# Altium PCB PCB1.PcbDoc
Units mm, origin at the board's own origin, x right, y up, seen from the top; angles counter-clockwise.
Board outline 100 x 50 mm, 2 copper layers (Top Layer, Bottom Layer); 29 components, 33 nets, 84 pads, 0 vias.
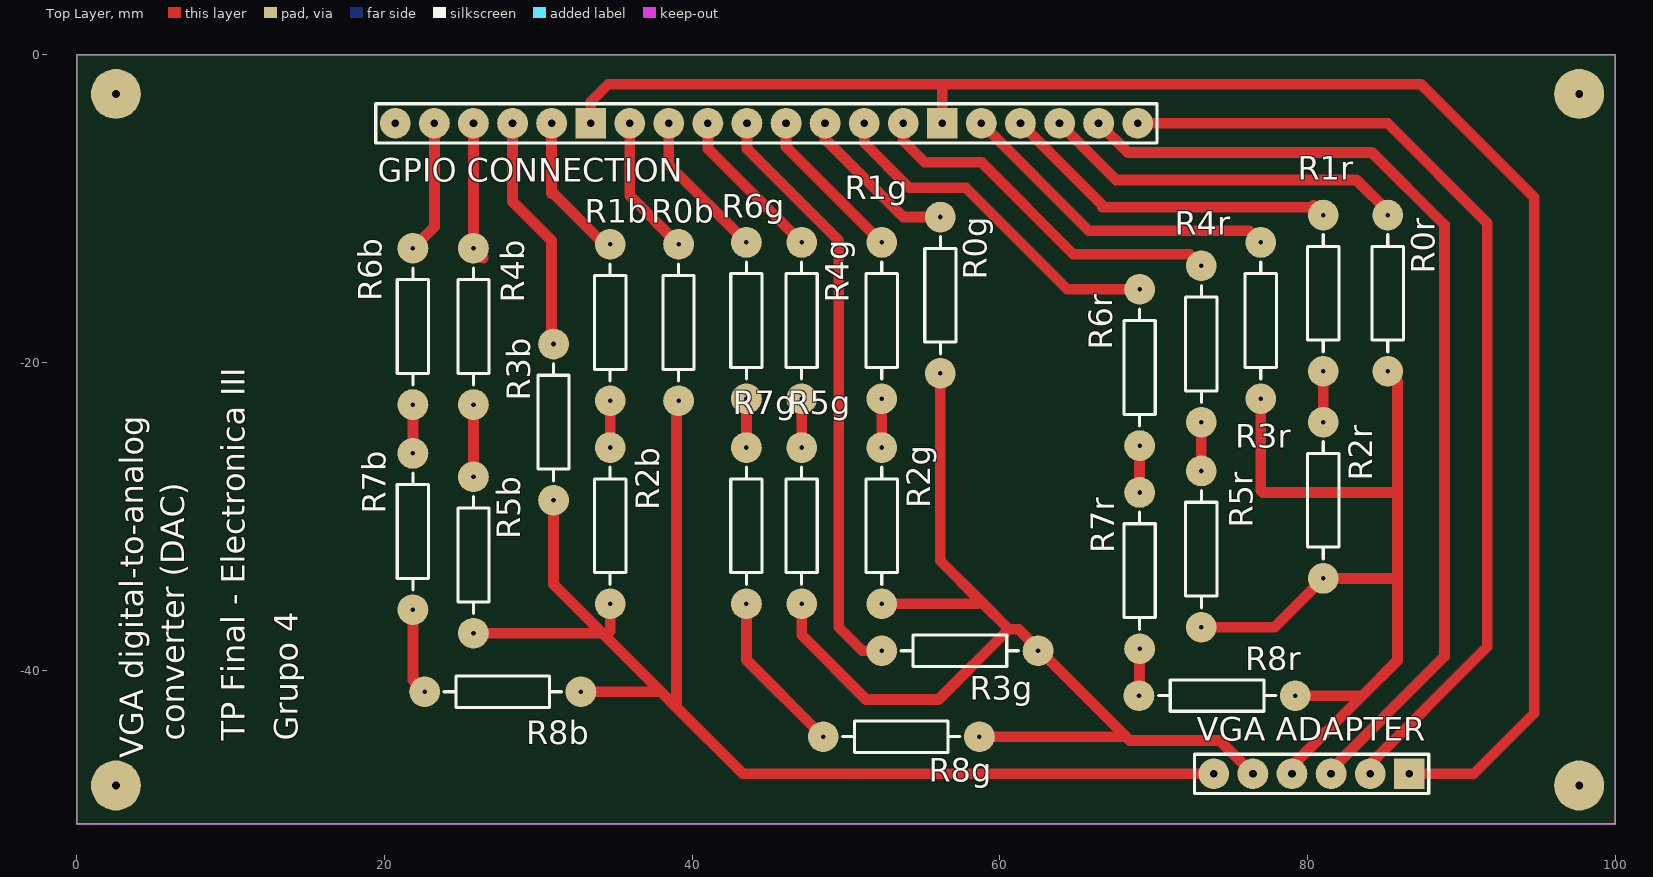
[diagram p0: Top Layer view]
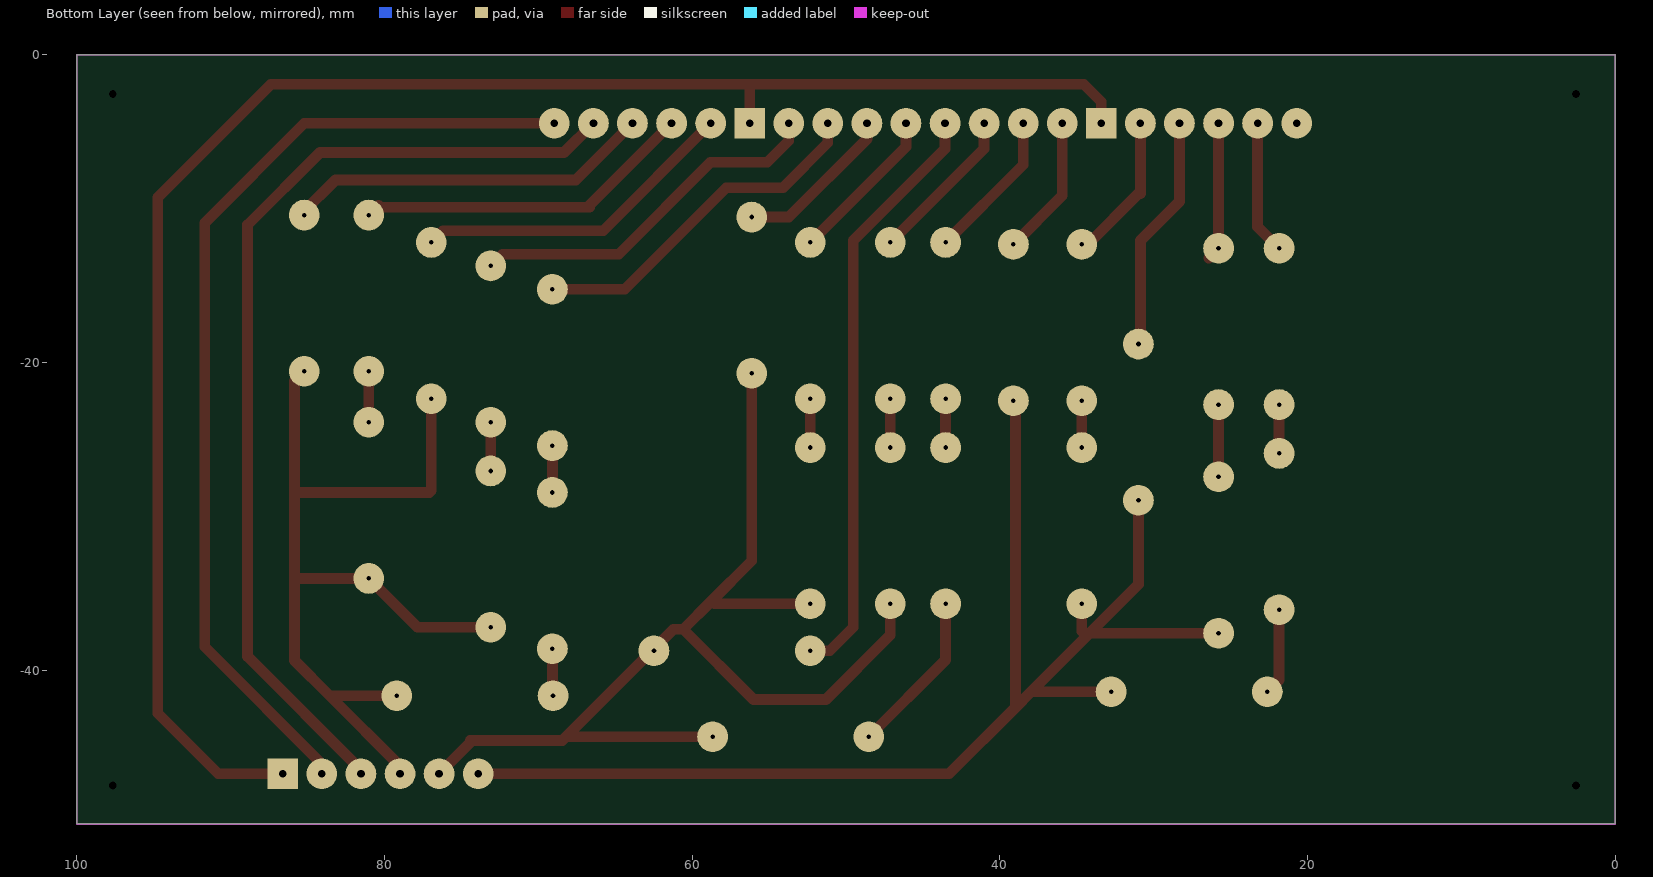
[diagram p1: Bottom Layer view, seen from below]
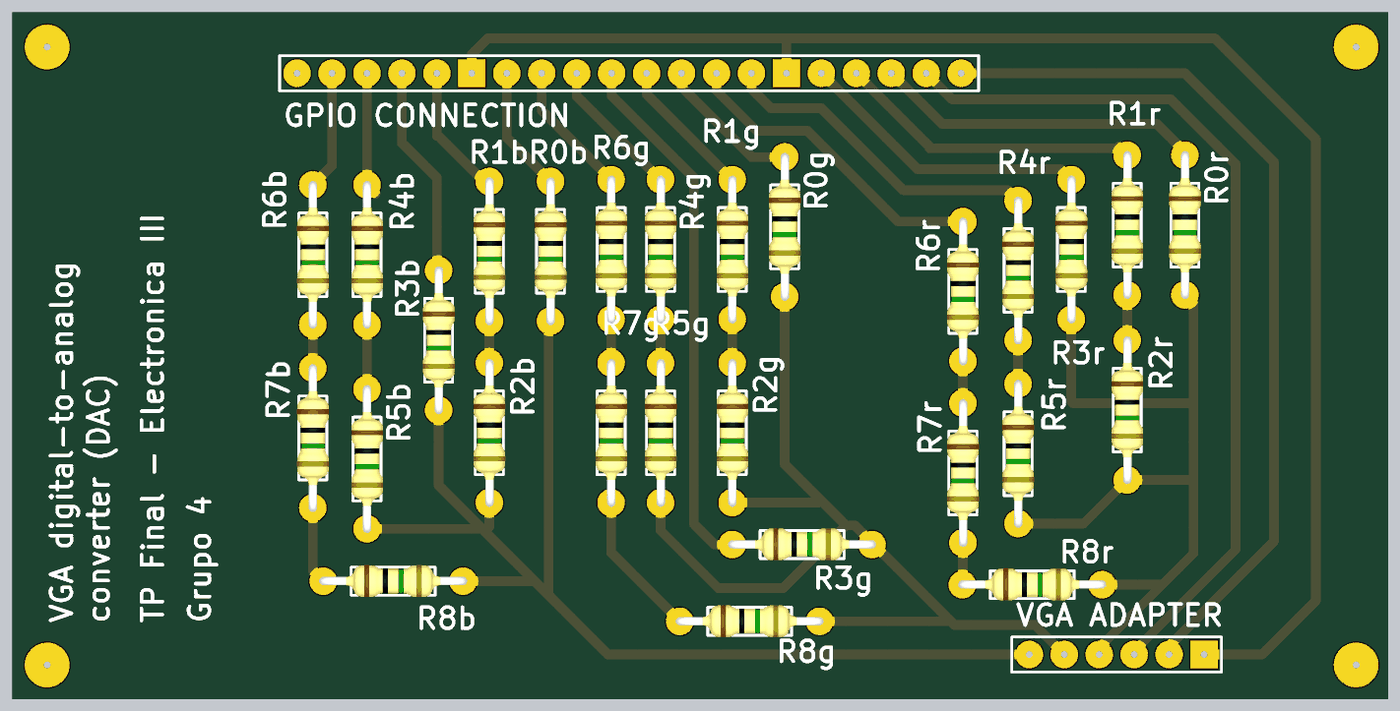
[diagram p2: 3D render of the assembled board from above, using the file's embedded part models]

## Layer stack, top to bottom
Top Layer: signal copper 0.0356
Dielectric: dielectric 0.32, FR-4, Dk 4.8
Bottom Layer: signal copper 0.0356

## Board outline
0,0 100,0 100,-50 0,-50

## Design rules (kind name [scope] priority, off if disabled: settings)
Clearance [All] p1: gap=0.4
PolygonConnect [All] p1: connectstyle=Relief reliefconductorwidth=0.254 reliefentries=4 polygonreliefangle="90 Angle" airgapwidth=0.254
RoutingVias [All] p1: holewidth=0.711 width=1.27 viastyle="Through Hole" minholewidth=0.711 minwidth=1.27 maxholewidth=0.711 maxwidth=1.27
SolderMaskExpansion [All] p1: expansion=0.102
Width [All] p1: maxlimit=0.7 minlimit=0.7 preferedwidth=0.7
28 further rules are at their usual default settings.

## Components (designator, comment, footprint, x,y, rotation, side; value= is the part's Value field where it differs from the comment)
"GPIO CONNECTION" "Header 20" HDR1X20 20.701,-4.445 r0 top
R0b "560" RES400 39.116,-12.319 r270 top
R0g "560" RES400 56.134,-10.541 r270 top
R0r "560" RES400 85.217,-10.414 r270 top
R1b "1000" RES400 34.671,-12.319 r270 top
R1g "1000" RES400 52.324,-12.192 r270 top
R1r "1000" RES400 81.026,-10.414 r270 top
R2b "68" RES400 34.671,-25.527 r270 top
R2g "68" RES400 52.324,-25.527 r270 top
R2r "68" RES400 81.026,-23.876 r270 top
R3b "2200" RES400 30.988,-18.796 r270 top
R3g "2200" RES400 52.324,-38.735 r0 top
R3r "2200" RES400 76.962,-12.192 r270 top
R4b "4000" RES400 25.781,-12.573 r270 top
R4g "4000" RES400 47.117,-12.192 r270 top
R4r "4000" RES400 73.098,-13.716 r270 top
R5b "330" RES400 25.781,-27.432 r270 top
R5g "330" RES400 47.117,-25.527 r270 top
R5r "330" RES400 73.098,-27.051 r270 top
R6b "2700" RES400 21.844,-12.573 r270 top
R6g "2700" RES400 43.525,-12.192 r270 top
R6r "2700" RES400 69.088,-15.24 r270 top
R7b "2700" RES400 21.844,-25.908 r270 top
R7g "2700" RES400 43.525,-25.527 r270 top
R7r "2700" RES400 69.088,-28.448 r270 top
R8b "2700" RES400 22.606,-41.402 r0 top
R8g "2700" RES400 48.514,-44.323 r0 top
R8r "2700" RES400 69.047,-41.656 r0 top
"VGA ADAPTER" "Header 6" HDR1X6 86.614,-46.736 r180 top

## Footprints (in the part's own frame and the unit in brackets; to place one, negate y for a bottom-side part, rotate by r counter-clockwise, add the part's x,y. Pads: shape width x height; smd on the part's side, far side on the other; paste and mask are expansions set on the pad)
HDR1X6 [mm] "Connector; Header; 6 Position"
  rect 2x2 hole 0.5: 1(0,0)
  round 2 hole 0.5: 2(2.54,0) 3(5.08,0) 4(7.62,0) 5(10.16,0) 6(12.7,0)
  silkscreen extent -1.27,-1.27 13.97,1.27
HDR1X20 [mm] "Connector; Header; 20 Position"
  round 2 hole 0.5: 1(0,0) 2(2.54,0) 3(5.08,0) 4(7.62,0) 5(10.16,0) 7(15.24,0) 8(17.78,0) 9(20.32,0) 10(22.86,0) 11(25.4,0) 12(27.94,0) 13(30.48,0) 14(33.02,0) 16(38.1,0) 17(40.64,0) 18(43.18,0) 19(45.72,0) 20(48.26,0)
  rect 2x2 hole 0.5: 6(12.7,0) 15(35.56,0)
  silkscreen extent -1.27,-1.27 49.53,1.27
RES400 [mm]
  round 2 hole 0.3: 1(0,0) 2(10.16,0)
  silkscreen extent 1.27,-1.02 8.89,1.02, body extent -0.3,-1.14 10.46,1.17, height 2.43

## Part data
"GPIO CONNECTION": "Header, 20-Pin"
R0b R0g R0r R1b R1g R1r R2b R2g R2r R3b R3g R3r R4b R4g R4r R5b R5g R5r R6b R6g R6r R7b R7g R7r R8b R8g R8r: library part RES
"VGA ADAPTER": "Header, 6-Pin"

## Free pads (board coordinates)
  round 3.25 / inner round 0 / far side round 0 hole 0.5: 0(2.54,-47.498) 0(2.54,-2.54) 0(97.663,-47.498) 0(97.663,-2.54)

## Nets (pads, with @x,y where several pads share a name; then routed paths per layer and width w, separated by ;. In a path a pad name is that pad's centre, name@x,y a point inside that pad or via, vN(x,y) a via of type N, cw(c..) or ccw(c..) an arc to the next point about the centre after c; other vN are vias at no path point)
"NetGPIO CONNECTION_2": "GPIO CONNECTION.2" R6b.1 | length 8.7
  Top Layer w0.7: R6b.1 23.241,-11.176 23.241,-4.445
"NetGPIO CONNECTION_3": "GPIO CONNECTION.3" R4b.1 | length 9
  Top Layer w0.7: 25.781,-4.445 R4b.1 R4b.1@26.416,-13.208
"NetGPIO CONNECTION_4": "GPIO CONNECTION.4" R3b.1 | length 15.5
  Top Layer w0.7: 28.321,-4.445 28.321,-9.525 30.861,-12.065 30.861,-18.669 R3b.1
"NetGPIO CONNECTION_5": "GPIO CONNECTION.5" R1b.1 | length 9.7
  Top Layer w0.7: 30.861,-4.445 30.861,-9.017 30.988,-9.017 34.29,-12.319 R1b.1
"NetGPIO CONNECTION_6": "GPIO CONNECTION.6" "GPIO CONNECTION.15" "VGA ADAPTER.1" | length 112.1
  Top Layer w0.7: 33.401,-4.445 33.401,-3.048 34.544,-1.905 56.261,-1.905 ; 56.261,-4.445 56.261,-1.905 ; 86.614,-46.736 90.805,-46.736 94.742,-42.799 94.742,-9.271 87.376,-1.905 56.261,-1.905
"NetGPIO CONNECTION_7": "GPIO CONNECTION.7" R0b.1 | length 9.2
  Top Layer w0.7: 35.941,-4.445 35.941,-9.144 R0b.1
"NetGPIO CONNECTION_8": "GPIO CONNECTION.8" R6g.1 | length 9.8
  Top Layer w0.7: 38.481,-4.445 38.481,-7.148 R6g.1
"NetGPIO CONNECTION_9": "GPIO CONNECTION.9" R4g.1 | length 10.3
  Top Layer w0.7: 41.021,-4.445 41.021,-6.096 R4g.1
"NetGPIO CONNECTION_10": "GPIO CONNECTION.10" R3g.1 | length 38.7
  Top Layer w0.7: 43.561,-4.445 43.561,-6.096 49.53,-12.065 49.53,-37.211 51.054,-38.735 R3g.1
"NetGPIO CONNECTION_11": "GPIO CONNECTION.11" R1g.1 | length 10.3
  Top Layer w0.7: 46.101,-4.445 46.101,-5.969 R1g.1
"NetGPIO CONNECTION_12": "GPIO CONNECTION.12" R0g.1 | length 10.6
  Top Layer w0.7: 48.641,-4.445 48.641,-5.461 53.721,-10.541 R0g.1
"NetGPIO CONNECTION_13": "GPIO CONNECTION.13" R6r.1 | length 23.1
  Top Layer w0.7: 51.181,-4.445 51.181,-5.715 54.102,-8.636 57.785,-8.636 64.389,-15.24 R6r.1
"NetGPIO CONNECTION_14": "GPIO CONNECTION.14" R4r.1 | length 23.9
  Top Layer w0.7: 53.721,-4.445 53.721,-5.588 55.118,-6.985 58.801,-6.985 64.77,-12.954 72.336,-12.954 R4r.1
"NetGPIO CONNECTION_16": "GPIO CONNECTION.16" R3r.1 | length 21.4
  Top Layer w0.7: 58.801,-4.445 65.786,-11.43 76.2,-11.43 R3r.1
"NetGPIO CONNECTION_17": "GPIO CONNECTION.17" R1r.1 | length 22.2
  Top Layer w0.7: 61.341,-4.445 66.675,-9.779 ; 66.675,-9.906 R1r.1@80.391,-9.906 ; R1r.1@80.391,-9.779 R1r.1
"NetGPIO CONNECTION_18": "GPIO CONNECTION.18" R0r.1 | length 23.9
  Top Layer w0.7: 63.881,-4.445 67.564,-8.128 83.185,-8.128 R0r.1@85.344,-10.287
"NetGPIO CONNECTION_19": "GPIO CONNECTION.19" "VGA ADAPTER.3" | length 64
  Top Layer w0.7: 66.421,-4.445 68.326,-6.35 84.201,-6.35 88.9,-11.049 88.9,-39.116 81.534,-46.482 81.534,-46.736
"NetGPIO CONNECTION_20": "GPIO CONNECTION.20" "VGA ADAPTER.2" | length 64.2
  Top Layer w0.7: 68.961,-4.445 85.217,-4.445 91.694,-10.922 91.694,-38.481 83.757,-46.419
NetR0b_2: "VGA ADAPTER.6" R0b.2 R2b.2 R3b.2 R5b.2 R8b.2 | length 89.4
  Top Layer w0.7: R5b.2 34.163,-37.592 ; R3b.2 30.988,-34.417 34.163,-37.592 ; R8b.2 37.973,-41.402 ; R2b.2 34.671,-37.465 34.544,-37.592 34.163,-37.592 ; R0b.2 38.989,-22.606 38.989,-42.418 ; 73.914,-46.736 43.307,-46.736 38.989,-42.418 ; 34.163,-37.592 37.973,-41.402 ; 37.973,-41.402 38.989,-42.418
NetR0g_2: "VGA ADAPTER.5" R0g.2 R2g.2 R3g.2 R5g.2 R8g.2 | length 73.5
  Top Layer w0.7: R5g.2 47.117,-37.719 51.308,-41.91 56.007,-41.91 60.579,-37.338 ; R2g.2 58.547,-35.687 58.737,-35.496 ; R0g.2 56.134,-32.893 58.737,-35.496 ; R8g.2 68.199,-44.323 ; 76.454,-46.736 74.422,-44.704 74.422,-44.577 68.453,-44.577 68.199,-44.323 ; 58.737,-35.496 60.579,-37.338 ; 60.579,-37.338 61.214,-37.338 68.199,-44.323
NetR0r_2: "VGA ADAPTER.4" R0r.2 R2r.2 R3r.2 R5r.2 R8r.2 | length 62.6
  Top Layer w0.7: R5r.2 77.851,-37.211 R2r.2 85.852,-34.036 ; R3r.2 76.962,-28.321 77.089,-28.448 85.852,-28.448 ; 78.994,-46.736 78.994,-46.228 83.566,-41.656 ; R8r.2 83.566,-41.656 ; R0r.2 85.852,-21.209 85.852,-28.448 ; 83.566,-41.656 85.852,-39.37 85.852,-34.036 ; 85.852,-34.036 85.852,-28.448
NetR1b_2: R1b.2 R2b.1 | length 3
  Top Layer w0.7: R2b.1 R1b.2
NetR1g_2: R1g.2 R2g.1 | length 3.2
  Top Layer w0.7: R2g.1 R1g.2
NetR1r_2: R1r.2 R2r.1 | length 3.3
  Top Layer w0.7: R2r.1 R1r.2
NetR4b_2: R4b.2 R5b.1 | length 4.7
  Top Layer w0.7: R5b.1 R4b.2
NetR4g_2: R4g.2 R5g.1 | length 3.2
  Top Layer w0.7: R5g.1 R4g.2
NetR4r_2: R4r.2 R5r.1 | length 3.2
  Top Layer w0.7: R5r.1 R4r.2
NetR6b_2: R6b.2 R7b.1 | length 3.2
  Top Layer w0.7: R7b.1 R6b.2
NetR6g_2: R6g.2 R7g.1 | length 3.2
  Top Layer w0.7: R7g.1 R6g.2
NetR6r_2: R6r.2 R7r.1 | length 3
  Top Layer w0.7: R7r.1 R6r.2
NetR7b_2: R7b.2 R8b.1 | length 5.6
  Top Layer w0.7: R7b.2 21.844,-40.64 R8b.1
NetR7g_2: R7g.2 R8g.1 | length 10.7
  Top Layer w0.7: R7g.2 43.525,-39.334 R8g.1
NetR7r_2: R7r.2 R8r.1 | length 3.1
  Top Layer w0.7: R8r.1 69.088,-41.615 R7r.2
pads on no net: "GPIO CONNECTION.1"

## Keep-outs
Keep-Out Layer:
  the board outline again, w0.1

## Silkscreen, mask and mechanical layers (free items; w line width, h text height)
Top Overlay:
  text "converter (DAC)" at 6.985,-44.577 h1.52 r90
  text "TP Final - Electronica III" at 10.922,-44.577 h1.52 r90
  text "Grupo 4" at 14.351,-44.577 h1.52 r90
  text "VGA digital-to-analog" at 4.318,-45.72 h1.52 r90